# Altium PCB Ethernet_boardv3_190116.PcbDoc
Units mil, origin at the board's own origin, x right, y up, seen from the top; angles counter-clockwise.
Board outline 1870.08 x 3051.18 mil, 2 copper layers (Top Layer, Bottom Layer), stack 64.8 mil thick; 67 components, 64 nets, 454 pads, 90 vias.
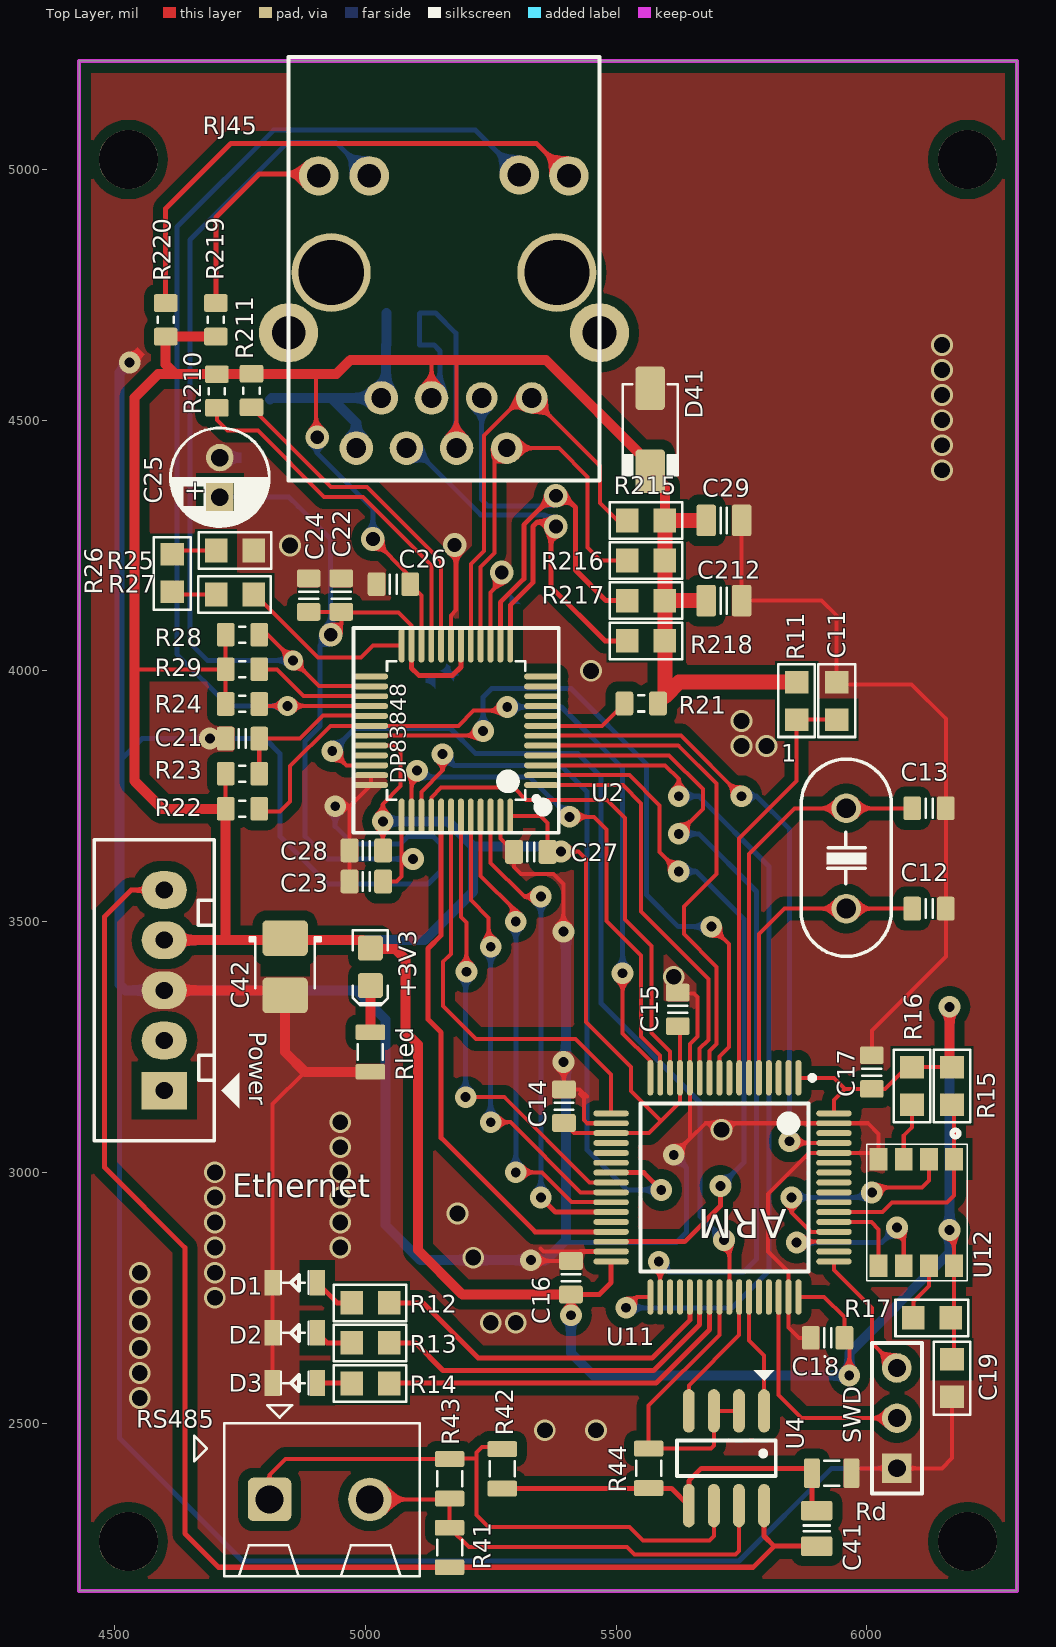
[diagram p0: Top Layer view]
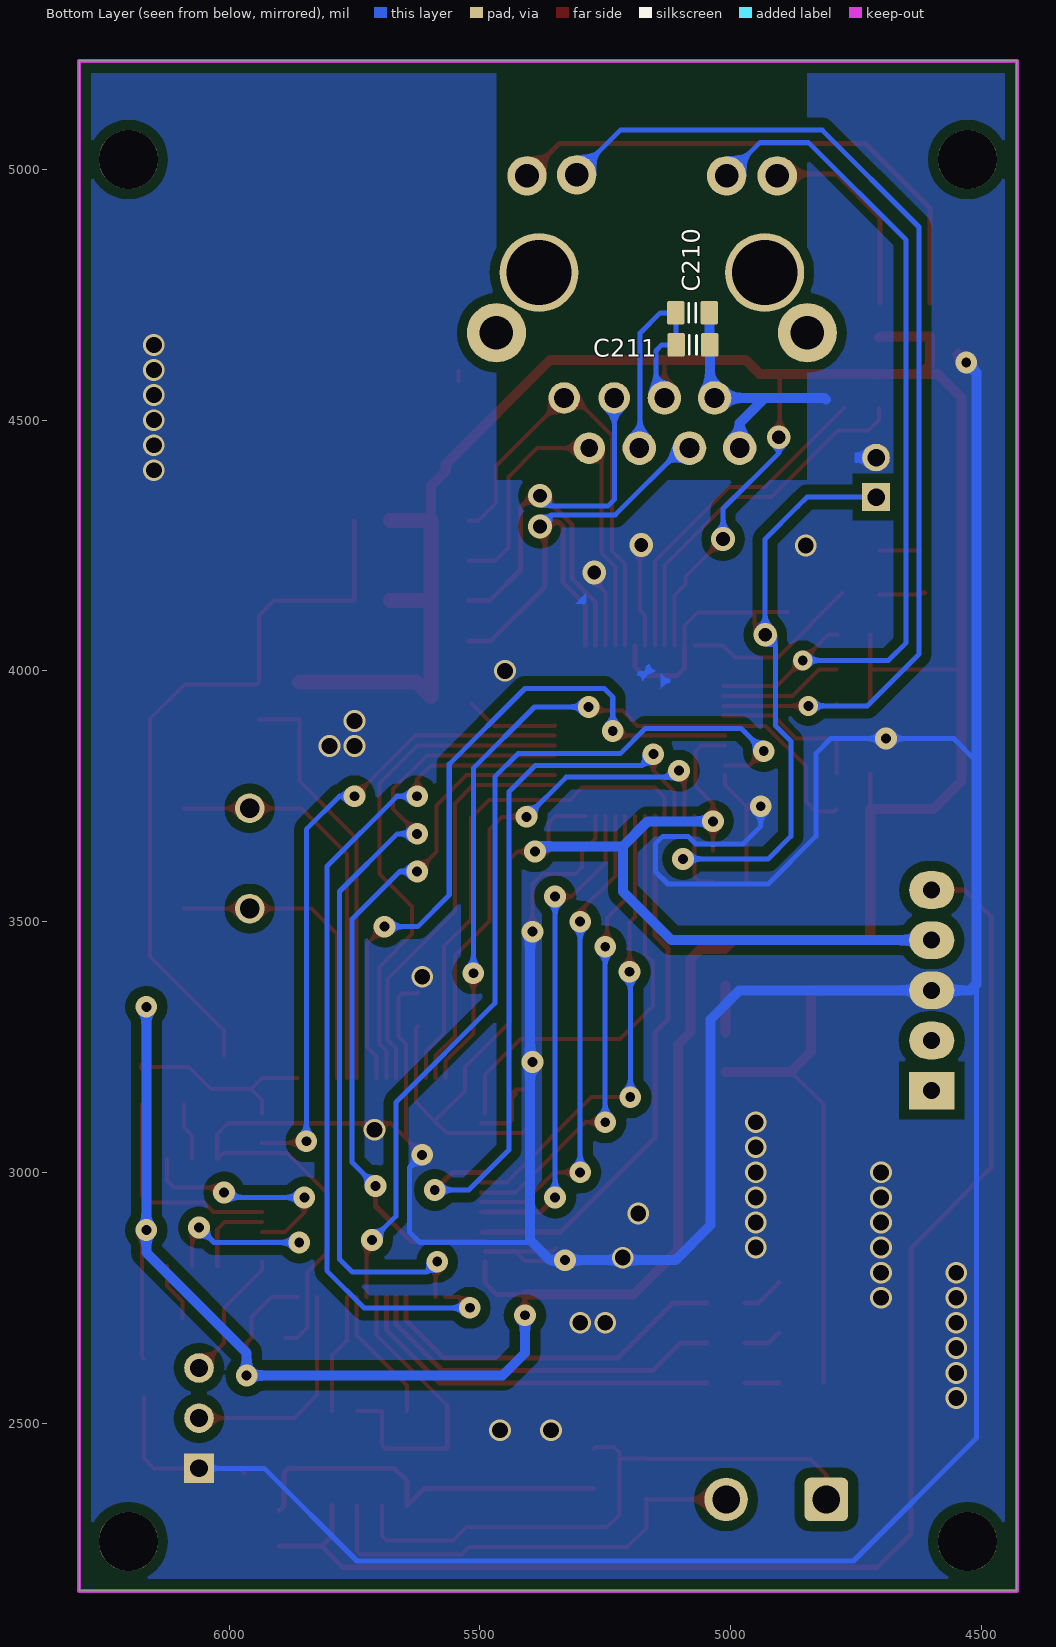
[diagram p1: Bottom Layer view, seen from below]
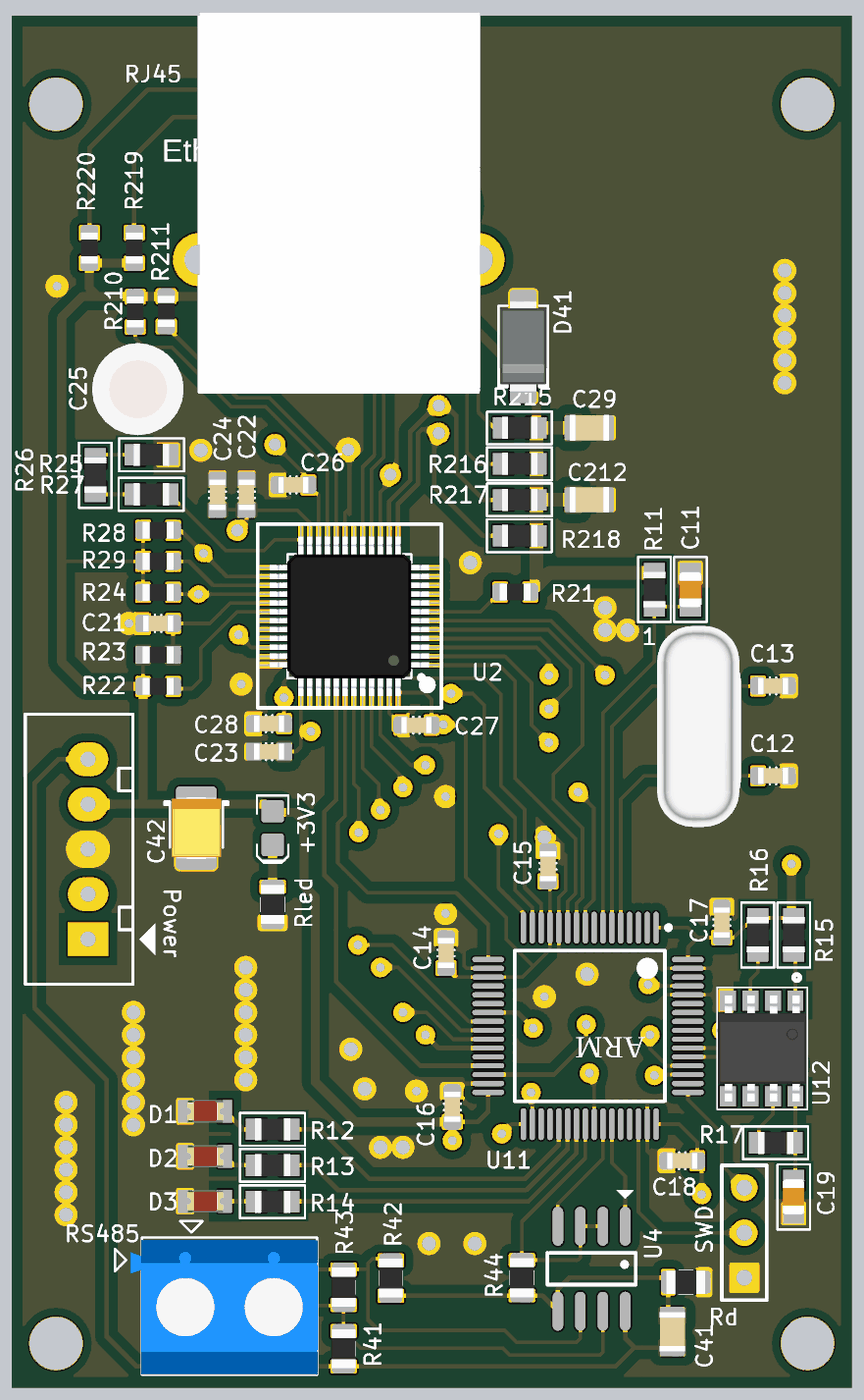
[diagram p2: 3D render of the assembled board from above, using the file's embedded part models]

## Layer stack, top to bottom
Top Solder: solder mask 0.4, Solder Resist, Dk 3.5
Top Layer: signal copper 1.4
Dielectric 1: dielectric 62, FR-4, Dk 4.8
Bottom Layer: signal copper 1.4
Bottom Solder: solder mask 0.4, Solder Resist, Dk 3.5

## Board outline
4429.13,2165.35 6299.21,2165.35 6299.21,5216.54 4429.13,5216.54

## Design rules (kind name [scope] priority, off if disabled: settings)
Clearance [All] p1: gap=20
Length [InNetClass('ETH_SIGN')] p1: maxlimit=1299.21 minlimit=1062.99
PlaneConnect [All] p1: planeconnectstyle=Direct reliefexpansion=20 reliefentries=4 reliefconductorwidth=25 reliefairgap=10
PolygonConnect PAD_GND [(InPadClass('All Pads') AND InNet('GND'))] p1: connectstyle=Direct reliefconductorwidth=25 reliefentries=4 polygonreliefangle="90 Angle" airgapwidth=10
PolygonConnect [All] p2: connectstyle=Direct reliefconductorwidth=10 reliefentries=4 polygonreliefangle="90 Angle" airgapwidth=10
RoutingVias [All] p1: holewidth=27.56 width=47.24 viastyle="Through Hole" minholewidth=19.68 minwidth=39.37 maxholewidth=196.85 maxwidth=196.85
SolderMaskExpansion [All] p1: expansion=4
Width Width_1 [All] p1: maxlimit=100 minlimit=8 preferedwidth=10
Width [InNetClass('ETH_SIGN')] p2: maxlimit=8 minlimit=8 preferedwidth=8
29 further rules are at their usual default settings.

## Classes and differential pairs
net class ETH_SIGN: MII_COL MII_CRS MII_MDC MII_MDIO MII_RX_ER MII_RXD0 MII_RXD1 MII_RXD2 MII_RXD3 MII_TX_CLK MII_TX_EN MII_TXD0 MII_TXD1 MII_TXD2 MII_TXD3
net class SPI_DATA: STM_SPI_MISO STM_SPI_MOSI STM_SPI_SCK

## Components (designator, comment, footprint, x,y, rotation, side; value= is the part's Value field where it differs from the comment)
1 "CRY_25MHZ" XT2 5959,3626 r270 top
+3V3 "Blue" LED-0805-K 5010,3410 r270 top
C11 "CAP_102_0603" CAP_0805_TOP 5940,3940 r90 top
C12 "CAP_18pF_0603" CAPC1608N_F#1 6124,3526 r0 top
C13 "CAP_18pF_0603" CAPC1608N_F#1 6124,3726 r0 top
C14 "CAP_104_0603" CAPC1608N_F#1 5396,3132 r90 top
C15 "CAP_104_0603" CAPC1608N_F#1 5623,3325 r90 top
C16 "CAP_104_0603" CAPC1608N_F#1 5410,2790 r90 top
C17 "CAP_104_0603" CAPC1608N_F#1 6010,3200 r90 top
C18 "CAP_104_0603" CAPC1608N_F#1 5921.75,2670 r180 top
C19 "CAP_104_0603" CAP_0805_TOP 6170,2590 r270 top
C21 "CAP_102_0603" CAPC1608N_F#1 4755,3865 r0 top
C22 "CAP_104_0603" CAPC1608N_F#2 4952,4151 r270 top
C23 "CAP_104_0603" CAPC1608N_F#2 5002,3580 r0 top
C24 "CAP_104_0603" CAPC1608N_F#2 4887,4151 r270 top
C25 "CAP_10uF/35V" CAP_10uF/35V 4710,4385 r90 top
C26 "CAP_104_0603" CAPC1608N_F#1 5056,4173 r0 top
C27 "CAP_104_0603" CAPC1608N_F#1 5330,3639 r180 top
C28 "CAP_104_0603" CAPC1608N_F#1 5002,3642 r0 top
C29 "CAP_104_0603" CAPC2012N_F 5715,4300 r0 top
C41 "100nF/104" CAPC2012N_F 5900,2290 r270 top
C42 "330uF/25V" CAPMP3528X210N 4840,3410 r270 top
C210 "105" CAPC1608N_F#3 5076,4714 r180 bottom
C211 "105" CAPC1608N_F#3 5075,4650 r180 bottom
C212 "105" CAPC2012N_F 5715,4140 r0 top
D1 "LED_RED_0805" "LED 0805 TOP" 4860,2780 r0 top
D2 "LED_BLUE_0805" "LED 0805 TOP" 4860,2680 r0 top
D3 "LED_GREEN_0805" "LED 0805 TOP" 4860,2580 r0 top
D41 "Diode" DO-214AC 5568,4481 r270 top
Power "JP5" CON5 4599,3163 r90 top
R11 "Res_4.7K_0805" RES_0805_TOP 5860,3940 r90 top
R12 "Res_330R_0805" RES_0805_TOP 5010,2740 r180 top
R13 "Res_330R_0805" RES_0805_TOP 5010,2660 r180 top
R14 "Res_330R_0805" RES_0805_TOP 5010,2579 r180 top
R15 "Res_4.7K_0805" RES_0805_TOP 6170,3172.6 r270 top
R16 "Res_4.7K_0805" RES_0805_TOP 6090,3172.6 r270 top
R17 "Res_4.7K_0805" RES_0805_TOP 6130,2710 r180 top
R21 "Res_2.2K_0805" RESC1608N_F#1 5550,3935 r0 top
R22 "Res_1.5K_0805" RESC1608N_F#1 4755,3725 r0 top
R23 "Res_4.7K_0805" RESC1608N_F#2 4755,3795 r180 top
R24 "Res_2.2K_0805" RESC1608N_F#1 4755,3934.07 r180 top
R25 "Res_47R_0805" RES_0805_TOP 4740,4240 r0 top
R26 "Res_120R_0805" RES_0805_TOP 4615,4195 r270 top
R27 "Res_4.7K_0805" RES_0805_TOP 4740,4152.16 r180 top
R28 "Res_0R_0603" RESC1608N_F#1 4755,4072.2 r0 top
R29 "Res_0R_0603" RESC1608N_F#1 4755,4003.13 r180 top
R41 "1k" RESC2012N_F 5168,2252 r270 top
R42 "1k" RESC2012N_F 5273,2409 r90 top
R43 "330R" RESC2012N_F 5168,2389 r270 top
R44 "330R" RESC2012N_F 5565,2410 r90 top
R210 "2k2" RESC1608N_F#1 4704,4558 r90 top
R211 "2k2" RESC1608N_F#1 4773,4559 r90 top
R215 "Res_49.9R_0805" RES_0805_TOP 5560,4300 r180 top
R216 "Res_49.9R_0805" RES_0805_TOP 5560,4220 r180 top
R217 "Res_49.9R_0805" RES_0805_TOP 5560,4140 r180 top
R218 "Res_49.9R_0805" RES_0805_TOP 5560,4060 r180 top
R219 "220R" RESC1608N_F#1 4702,4700 r90 top
R220 "220R" RESC1608N_F#1 4602,4700 r90 top
Rd "Res" RESC2012N_F 5930,2400 r0 top
RJ45 "HR911105A" HR911105A 4845,4370 r0 top
Rled "Res_0805_1k" RESC2012N_F 5010,3240 r270 top
RS485 "Stackable ScrewTerm" 2P_PCB1 4754,2499.43 r270 top
SWD "Header 3" HDR1X3 6060,2410 r90 top
U2 "DP83848CVV" LQFP48 5181,3881 r180 top
U4 "MAX485" SO-8 5720,2430 r270 top
U11 "STM32F107RC" LQFP64_N 5715.98,2970.02 r270 top
U12 "S25FL204K" SOIC_8 6100,2920 r270 top

## Footprints (in the part's own frame and the unit in brackets; to place one, negate y for a bottom-side part, rotate by r counter-clockwise, add the part's x,y. Pads: shape width x height; smd on the part's side, far side on the other; paste and mask are expansions set on the pad)
2P_PCB1 [mm]
  rrect25% 2.2x2.2 hole 1.4: 1(3.85,1.397)
  round 2.2 hole 1.4: 2(3.85,6.477)
  silkscreen extent -0.93,-2.41 7.75,9.02, body extent 0.14,-1.54 7.74,9.06, height 10.01
CAP_10uF/35V [mil]
  rect 55.12x55.12 hole 35: 1(-38.39,0)
  round 55 hole 35: 2(40.35,0)
  silkscreen extent -97,-98 99,98, body extent -101,-101 104,101, height 30
CAP_0805_TOP [mm]
  rect 1.14x1.2 smd: 1(-0.95,0) 2(0.95,0)
  silkscreen extent -1.83,-0.92 1.85,0.93, body extent -1,-0.62 1,0.63, height 0.8
CAPC1608N_F#1 [mm] "Chip Capacitor, Body 1.6x0.8mm, 0603, IPC Medium Density, for Flex circuits"
  round 0.254 on Mech14: 0(0,0)
  rrect50% 1.1x1 on Top Solder: 1(-0.85,0) 1(0.85,0)
  rrect25% 0.9x1.2 smd paste-1: 1(-0.85,0) 2(0.85,0)
  rrect50% 0.9x1 on Top Paste: 1(-0.85,0) 1(0.85,0)
  Top Layer pour cut-out: -0.4,0.6 0.4,0.6 0.4,-0.6 -0.4,-0.6
  silkscreen extent -0.18,-0.48 0.18,0.48, body extent -0.85,-0.45 0.85,0.45, height 0.89
CAPC1608N_F#2 [mm] "Chip Capacitor, Body 1.6x0.8mm, 0603, IPC Medium Density, for Flex circuits"
  round 0.254 on Mech14: 0(0,0)
  rrect25% 1.1x1 on Top Solder: 1(-0.85,0) 1(0.85,0)
  rrect25% 0.9x1.2 smd paste-1: 1(-0.85,0) 2(0.85,0)
  rrect25% 0.9x1 on Top Paste: 1(-0.85,0) 1(0.85,0)
  Top Layer pour cut-out: -0.4,0.6 0.4,0.6 0.4,-0.6 -0.4,-0.6
  silkscreen extent -0.18,-0.48 0.18,0.48, body extent -0.85,-0.45 0.85,0.45, height 0.89
CAPC1608N_F#3 [mm] "Chip Capacitor, Body 1.6x0.8mm, 0603, IPC Medium Density, for Flex circuits"
  round 0.254 on Mech14: 0(0,0)
  rrect50% 1.1x1 on Bottom Solder: 1(-0.85,0) 1(0.85,0)
  rrect25% 0.9x1.2 smd paste-1: 1(-0.85,0) 2(0.85,0)
  rrect50% 0.9x1 on Bottom Paste: 1(-0.85,0) 1(0.85,0)
  Top Layer pour cut-out: -0.4,0.6 0.4,0.6 0.4,-0.6 -0.4,-0.6
  silkscreen extent -0.18,-0.48 0.18,0.48, body extent -0.85,-0.45 0.85,0.45, height 0.89
CAPC2012N_F [mm] "Chip Capacitor, Body 2.0x1.2mm, 0805, IPC Medium Density, for Flex circuits"
  round 0.254 on Mech14: 0(0,0)
  rrect25% 1.2x1.4 on Top Solder: 1(-0.9,0) 1(0.9,0)
  rrect25% 1x1.6 smd paste-1: 1(-0.9,0) 2(0.9,0)
  rrect25% 1x1.4 on Top Paste: 1(-0.9,0) 1(0.9,0)
  Top Layer pour cut-out: -0.4,0.8 0.4,0.8 0.4,-0.8 -0.4,-0.8
  silkscreen extent -0.15,-0.65 0.15,0.65, body extent -1.1,-0.72 1.1,0.73, height 1.34
CAPMP3528X210N [mm] "Molded body capacitor, Body 3.5x2.8mm, 1210, IPC Nominal settings"
  round 0.254 on Mech14: 0(0,0)
  rrect25% 1.8x2.3 smd: 1(-1.45,0) 2(1.45,0)
  Top Layer pour cut-out: -0.508,1.27 0.508,1.27 0.508,-1.27 -0.508,-1.27
  silkscreen extent -1.5,-1.8 1.1,1.8, body extent -1.75,-1.4 1.75,1.4, height 2.1
CON5 [mil] "CON5"
  rect 75x90 hole 34: 1(0,0)
  oval 75x90 hole 34: 2(100,0) 3(200,0) 4(300,0) 5(400,0)
  silkscreen extent -100,-150 500,140
DO-214AC [mm] "JEDEC DO214 variation AC. SMA"
  round 0.508 on Mech14: 0(0,0)
  rrect25% 2.2x1.5 smd: A(-2.1,0) K(2.1,0)
  silkscreen extent -2.3,-1.4 2.3,1.4, body extent -2.6,-1.3 2.6,1.3, height 2.42
HDR1X3 [mm] "Connector; Header; 3 Position"
  rect 1.5x1.5 hole 0.9: 1(0,0)
  round 1.5 hole 0.9: 2(2.54,0) 3(5.08,0)
  silkscreen extent -1.27,-1.27 6.35,1.27, body extent -1.27,-1.27 6.35,1.27, height 7
HR911105A [mm] "HanRun HR911105A"
  round 1.6 hole 1: 1(12.369,4.425) 3(9.829,4.425)
  round 1.6 hole 0.9: 2(11.099,1.885)
  round 1.7 hole 1: 4(8.559,1.885) 5(7.289,4.425) 6(6.019,1.885) 7(4.749,4.425) 8(3.479,1.885)
  round 2 hole 1.2: 9(14.249,15.675) 10(11.735,15.723) 11(4.139,15.675) 12(1.575,15.672)
  round 3 hole 1.7: G(0.049,7.725) G(15.799,7.725)
  round 4 hole 3.3: H(2.209,10.775) H(13.639,10.775)
  silkscreen extent 0.05,0.25 15.8,21.69, body extent 0.05,0.29 15.93,21.69, height 13.51
"LED 0805 TOP" [mm]
  rect 0.8x1.3 smd: 1(1.118,0) 2(-1.143,0)
  silkscreen extent -0.71,-0.58 0.69,0.58, body extent -1.01,-0.62 1.01,0.63, height 1.1
LED-0805-K [mil]
  round 20 on Mech14: 0(0,0)
  rrect25% 50x50 smd: A(-37.5,0) K(37.5,0)
  Top Layer pour cut-out: -15,30 15,30 15,-30 -15,-30
  silkscreen extent -72,-35 77,35, body extent -39,-25 39,25, height 31
LQFP48 [mm] "Thin QFP, 48-Leads, Body 7x7mm, Pitch 0.5mm, IPC Medium Density"
  oval 1.75x0.3 smd paste-0.102 mask+0.051: 1(-4.318,2.761) 2(-4.318,2.261) 3(-4.318,1.761) 4(-4.318,1.261) 5(-4.318,0.761) 6(-4.318,0.261) 7(-4.318,-0.239) 8(-4.318,-0.739) 9(-4.318,-1.239) 10(-4.318,-1.739) 11(-4.318,-2.239) 12(-4.318,-2.739) 25(4.318,-2.739) 26(4.318,-2.239) 27(4.318,-1.739) 28(4.318,-1.239) 29(4.318,-0.739) 30(4.318,-0.239) 31(4.318,0.261) 32(4.318,0.761) 33(4.318,1.261) 34(4.318,1.761) 35(4.318,2.261) 36(4.318,2.761)
  oval 0.3x1.75 smd paste-0.102 mask+0.051: 13(-2.743,-4.318) 14(-2.243,-4.318) 15(-1.743,-4.318) 16(-1.243,-4.318) 17(-0.743,-4.318) 18(-0.243,-4.318) 19(0.257,-4.318) 20(0.757,-4.318) 21(1.257,-4.318) 22(1.757,-4.318) 23(2.257,-4.318) 24(2.757,-4.318) 37(2.757,4.318) 38(2.257,4.318) 39(1.757,4.318) 40(1.257,4.318) 41(0.757,4.318) 42(0.257,4.318) 43(-0.243,4.318) 44(-0.743,4.318) 45(-1.243,4.318) 46(-1.743,4.318) 47(-2.243,4.318) 48(-2.743,4.318)
  silkscreen extent -5.2,-5.2 5.2,5.18, body extent -4.5,-4.5 4.5,4.5, height 1.5
LQFP64_N [mm] "Thin QFP, 64-Leads, Body 10x10mm, Pitch 0.5mm, IPC Medium Density"
  oval 1.8x0.3 smd: 1(-5.55,3.75) 2(-5.55,3.25) 3(-5.55,2.75) 4(-5.55,2.25) 5(-5.55,1.75) 6(-5.55,1.25) 7(-5.55,0.75) 8(-5.55,0.25) 9(-5.55,-0.25) 10(-5.55,-0.75) 11(-5.55,-1.25) 12(-5.55,-1.75) 13(-5.55,-2.25) 14(-5.55,-2.75) 15(-5.55,-3.25) 16(-5.55,-3.75) 33(5.55,-3.75) 34(5.55,-3.25) 35(5.55,-2.75) 36(5.55,-2.25) 37(5.55,-1.75) 38(5.55,-1.25) 39(5.55,-0.75) 40(5.55,-0.25) 41(5.55,0.25) 42(5.55,0.75) 43(5.55,1.25) 44(5.55,1.75) 45(5.55,2.25) 46(5.55,2.75) 47(5.55,3.25) 48(5.55,3.75)
  oval 0.3x1.8 smd: 17(-3.75,-5.74) 18(-3.25,-5.74) 19(-2.75,-5.74) 20(-2.25,-5.74) 21(-1.75,-5.74) 22(-1.25,-5.74) 23(-0.75,-5.74) 24(-0.25,-5.74) 25(0.25,-5.74) 26(0.75,-5.74) 27(1.25,-5.74) 28(1.75,-5.74) 29(2.25,-5.74) 30(2.75,-5.74) 31(3.25,-5.74) 32(3.75,-5.74) 49(3.75,5.55) 50(3.25,5.55) 51(2.75,5.55) 52(2.25,5.55) 53(1.75,5.55) 54(1.25,5.55) 55(0.75,5.55) 56(0.25,5.55) 57(-0.25,5.55) 58(-0.75,5.55) 59(-1.25,5.55) 60(-1.75,5.55) 61(-2.25,5.55) 62(-2.75,5.55) 63(-3.25,5.55) 64(-3.75,5.55)
  silkscreen extent -5.67,-4.25 4.25,4.58, body extent -5,-5 5,5, height 1.6
RES_0805_TOP [mm]
  rect 1.14x1.2 smd: 1(-0.95,0) 2(0.95,0)
  silkscreen extent -1.83,-0.92 1.85,0.93, body extent -1,-0.62 1,0.62, height 0.5
RESC1608N_F#1 [mm] "Chip Resistor, Body 1.6x0.8mm, 0603, IPC Medium Density, for Flex circuits"
  round 0.254 on Mech14: 0(0,0)
  rrect50% 1.1x1 on Top Solder: 1(-0.85,0) 1(0.85,0)
  rrect25% 0.9x1.2 smd paste-1: 1(-0.85,0) 2(0.85,0)
  rrect50% 0.9x1 on Top Paste: 1(-0.85,0) 1(0.85,0)
  Top Layer pour cut-out: -0.4,0.6 0.4,0.6 0.4,-0.6 -0.4,-0.6
  silkscreen extent -0.15,-0.41 0.15,0.41, body extent -0.87,-0.47 0.88,0.48, height 0.54
RESC1608N_F#2 [mm] "Chip Resistor, Body 1.6x0.8mm, 0603, IPC Medium Density, for Flex circuits"
  round 0.254 on Mech14: 0(0,0)
  rrect25% 1.1x1 on Top Solder: 1(-0.85,0) 1(0.85,0)
  rrect25% 0.9x1.2 smd paste-1: 1(-0.85,0) 2(0.85,0)
  rrect25% 0.9x1 on Top Paste: 1(-0.85,0) 1(0.85,0)
  Top Layer pour cut-out: -0.4,0.6 0.4,0.6 0.4,-0.6 -0.4,-0.6
  silkscreen extent -0.15,-0.41 0.15,0.41, body extent -0.87,-0.47 0.88,0.48, height 0.54
RESC2012N_F [mm] "Chip Resistor, Body 2.0x1.2mm, 0805, IPC Medium Density"
  round 0.254 on Mech14: 0(0,0)
  rrect50% 1x1.3 on Top Solder: 1(-1,0) 1(1,0)
  rrect25% 0.8x1.5 smd paste-1: 1(-1,0) 2(1,0)
  rrect50% 0.8x1.3 on Top Paste: 1(-1,0) 1(1,0)
  Top Layer pour cut-out: -0.6,0.75 0.6,0.75 0.6,-0.75 -0.6,-0.75
  silkscreen extent -0.38,-0.64 0.38,0.64, body extent -1.1,-0.67 1.1,0.68, height 0.69
SO-8 [mm] "8-Pin Small Outline Integrated Circuit 1.27 mm Pitch, IPC Medium Density"
  oval 2.2x0.6 smd: 1(-2.4,1.905) 2(-2.4,0.635) 3(-2.4,-0.635) 4(-2.4,-1.905) 5(2.4,-1.905) 6(2.4,-0.635) 7(2.4,0.635) 8(2.4,1.905)
  silkscreen extent -4.45,-2.5 0.9,2.5, body extent -1.95,-2.45 1.95,2.45, height 1.75
SOIC_8 [mm]
  rect 1.14x0.91 smd: 1(-2.7,1.87) 2(-2.7,0.6) 3(-2.7,-0.67) 4(-2.7,-1.94) 5(2.7,-1.94) 6(2.7,-0.67) 7(2.7,0.6) 8(2.7,1.87)
  silkscreen extent -4.17,-2.55 3.45,2.55, body extent -3,-2.5 3.01,2.5, height 1.75
XT2 [mm]
  round 1.5 hole 1: 1(-2.54,0) 2(2.54,0)
  silkscreen extent -5.03,-2.29 4.96,2.29, body extent -5.93,-2.36 5.42,2.29, height 3.5

## Part data
1: library part cry, "Crystal Oscillator"
+3V3: library part LED_SMD_Blue_0805_100mcd, "LED 0805 SMD Blue 100mcd 470nm"
C11 C12 C13 C14 C15 C16 C17 C18 C19 C21 C22 C23 C24 C26 C27 C28 C29 C210 C211 C212: library part "Cap 1206 BUT", "Capacitor"
C25: library part "CAP P"
C41: library part "CAP NP"
C42: library part CP4, "Cap 1000uF/16V - 220uF/50V"
D1 D2 D3: library part "LED 0805 TOP", "Typical INFRARED GaAs LED"
Power: library part Con5, "Connector 5"
R11 R12 R13 R14 R15 R16 R17 R21 R22 R23 R24 R25 R26 R27 R28 R29 R215 R216 R217 R218 R219 R220: library part Res, "Resistor"
R41 R42 R43 R44: library part Res, "Tro dan"
R210 R211 Rled: library part Res
RJ45: library part RJ45-LED
RS485: library part 2P_ScrewTerm_90S_3.81MM, "Terminal Block Screw Type THT 2-Position 3.81mm pitch"
SWD: "Header, 3-Pin"
U4: "RS232 - RS485 (Same sn75176)"
U11: library part STM32F103RBT6, "STM32 ARM-based 32-bit MCU with 128 Kbytes Flash, 64-pin LQFP, Industrial Temperature"

## Free pads (board coordinates)
  round 118.11 hole 118.11: 1(4527.56,2263.78) 1(4527.56,5019.69) 1(6200.79,2263.78) 1(6200.79,5019.69)

## Via types
v1: diameter 43.31, hole 19.68, Top Layer to Bottom Layer, 44 vias
v2: diameter 43.31, hole 31.5, Top Layer to Bottom Layer, 37 vias
v3: diameter 47.24, hole 27.56, Top Layer to Bottom Layer, 7 vias
v4: diameter 39.37, hole 19.68, Top Layer to Bottom Layer, 2 vias

## Nets (pads, with @x,y where several pads share a name; then routed paths per layer and width w, separated by ;. In a path a pad name is that pad's centre, name@x,y a point inside that pad or via, vN(x,y) a via of type N, cw(c..) or ccw(c..) an arc to the next point about the centre after c; other vN are vias at no path point)
25M_OUT: U2.25
+3V3: +3V3.A C14.1@5396,3098.54 C15.1@5623,3291.54 C16.1@5410,2756.54 C17.1@6010,3166.54 C18.1@5955.21,2670 C19.1 C26.2 C27.1@5363.46,3639 C28.2 C29.1@5679.57,4300 C42.1 C210.1@5109.46,4714 C211.1@5108.46,4650 C212.1@5679.57,4140 D41.K Power.4 R11.2 R15.1 R16.1 R17.1 R21.2 R22.1@4721.54,3725 R23.2 R24.2 R28.1@4721.54,4072.2 R29.2 R210.2 R211.2 R215.1 R216.1 R217.1 R218.1 R219.1@4702,4666.54 R220.1@4602,4666.54 RJ45.4 RJ45.5 U2.22 U2.32 U2.48 U11.1 U11.13 U11.19 U11.32 U11.48 U11.64 U12.8 | length 12016.8
  Top Layer w8: 4540,4000 4543.13,4003.13 R29.2 ; R22.1@4721.54,3725 R23.2 ; R24.2 R29.2 ; R28.1@4721.54,4072.2 R29.2 ; 4902,4592 4902,4468 v3(4904,4466) ; +3V3.A +3V3.A@5012.5,3445 ; U2.32 5058,3851.04 5070,3839.04 5070,3770 5035,3735 v1(5035,3700) 5035,3642.46 C28.2 ; v3(5015,4263) 5089.46,4188.54 C26.2 5111.83,4150.63 U2.22 ; 5125,4620 5131.96,4613.04 RJ45.5 ; 5179,4620 5181.46,4617.54 5181.46,4444.69 RJ45.4 ; U2.48 5349,3711 5363.46,3696.54 5363.46,3639 5419,3639 5420,3640 ; v1(5390,3640) 5420,3640 ; C14.1@5396,3098.54 5416.24,3078.29 U11.19 5565.69,3078.29 5590,3102.6 ; v1(5410,2715) C16.1@5410,2756.54 ; C15.1@5623,3291.54 5627.4,3287.13 U11.13 5627.4,3140 5590,3102.6 ; U11.48 5915,2751.52 5955.21,2711.31 5955.21,2670 5965,2660.21 v1(5965,2595) ; U11.1 5934.54,3188.53 5956.54,3166.54 ; U11.64 5934.49,3144.49 5956.54,3166.54 ; v1(6165,2885) 6175,2885 6173.62,2883.62 U12.8 6173.62,2631.02 C19.1 ; R15.1 R16.1 6080,3210 6036.54,3166.54 6010,3166.54 5956.54,3166.54 ; 5420,3640 5425,3640 5440,3625 5440,3300 5530,3210 5530,3162.6 5590,3102.6
  Top Layer w10: C16.1@5410,2756.54 5466.54,2756.54 5490,2780 U11.32
  Top Layer w20: Power.4 4720,3463 ; R210.2 R210.2@4704,4592 ; R219.1@4704,4664.54 4702,4666.54 4602,4666.54 4602,4611 4621,4592 ; +3V3.A 4994.5,3463 4720,3463 ; +3V3.A@5012.5,3445 5060,3445 5080,3425 5080,3280 5105,3255 5105,2845 5193.46,2756.54 C16.1@5410,2756.54 ; R215.1 5597.4,4368.92 D41.K 5568,4412 5360,4620 5179,4620 5125,4620 4970,4620 4942,4592 4902,4592 R210.2@4704,4592 ; v1(6165,3330) 6165,3215 R15.1 ; 4621,4592 4587,4592 4540,4545 4540,4000 4540,3780 4595,3725 4721.54,3725 4721.54,3464.54 4720,3463 ; 4621,4592 R210.2@4704,4592
  Top Layer w30: C212.1@5679.57,4140 R217.1 ; C29.1@5679.57,4300 R215.1 R216.1 R217.1 ; R11.2 5625.87,3977.4 5597.4,3948.94 R218.1 R217.1
  Bottom Layer w10: v3(4904,4466) 4904,4434 5015,4323 v3(5015,4263) ; RJ45.5 5149,4561.24 5149,4638 5137,4650 5108.46,4650 5108.46,4713 5109.46,4714 5140,4714 5180.54,4673.46 5180.54,4445.62 RJ45.4
  Bottom Layer w20: Power.4 5118,3463 5215,3560 5215,3650 ; v1(5035,3700) 5165,3700 5215,3650 ; v1(5390,3640) 5380,3650 5215,3650 ; v1(5410,2715) 5410,2640 5455,2595 v1(5965,2595) 5965,2640 6165,2840 v1(6165,2885) v1(6165,3330)
+5V: C41.2 Power.5 R41.2 U4.8 | length 2831.9
  Top Layer w10: Power.5 4533,3563 4480,3510 4480,3010 4640,2850 4640,2280 4707.37,2212.63 R41.2 5773.5,2212.63 5815.43,2254.57 ; U4.8 5795,2275 5815.43,2254.57 ; C41.2 5815.43,2254.57
DGND: C41.1@5900,2325.43 R42.1@5273,2369.63 R44.1@5565,2370.63 Rd.1@5890.63,2400 U4.5 | length 774.2
  Top Layer w10: R42.1@5273,2369.63 5610.88,2369.63 U4.5 5645,2385 5670,2410 5880.63,2410 5890.63,2400 5890.63,2334.8 C41.1@5900,2325.43
ETH_MCO: U2.34 U11.41 | length 1826.6
  Top Layer w8: v1(4934,3840) 4962.33,3811.67 U2.34 ; v1(5715,2865) 5725.83,2854.17 U11.41
  Bottom Layer w10: v1(4934,3840) 4979,3885 5170,3885 5220,3835 5424,3835 5470,3789 5470,3337 5667.5,3139.5 5667.5,2912.5 v1(5715,2865)
GND: C11.2 C12.2 C13.2 C14.2 C15.2 C16.2 C17.2 C18.2 C19.2 C21.1@4721.54,3865 C22.1@4952,4184.46 C23.1@4968.54,3580 C24.1@4887,4184.46 C25.2 C26.1@5022.54,4173 C27.2 C28.1@4968.54,3642 C29.2 C42.2 C210.2 C211.2 C212.2 D1.2 D2.2 D3.2 D41.A Power.3 R25.2 Rd.2 RJ45.7 RJ45.8 Rled.2 SWD.1 U2.15 U2.19 U2.35 U2.36 U2.47 U11.12 U11.18 U11.31 U11.47 U11.60 U11.63 U12.4 | length 14239.4
  Top Layer w8: D3.2 D2.2 D1.2 4815,3136.26 4879.37,3200.63 ; v1(4940,3730) 4940.17,3729.83 4968.54,3729.83 ; C23.1@4968.54,3580 4968.54,3642 4968.54,3729.83 ; U2.35 U2.36 4968.54,3729.83 ; U2.19 5170.89,4110.89 5181,4121 5181,4248 v3(5178,4251) v3@5170.89,4243.89 ; U2.15 5249.63,4156.63 5272,4179 v3(5272,4196) ; U2.47 5269.31,3666.22 C27.2 5296.54,3608.46 5310,3595 5375,3595 5395,3575 v1(5395,3480) ; v1(5330,2825) 5331.54,2823.46 C16.2 5428.61,2842.07 5354.93,2842.07 5349,2848 ; v1(5395,3220) 5396,3219 C14.2 5427.54,3165.46 5442,3151 ; 5428,3156 5436,3148 5436,3104 5442.02,3097.98 5458.02,3097.98 U11.18 U11.18@5497.48,3097.98 ; D41.A@5543,4577.68 D41.A@5543,4598.12 ; v1(5615,3035) 5647.09,3067.09 ; C15.2 5624.46,3357 5655,3357 5662,3350 5662,3271 5647.09,3256.09 U11.12 5647.09,3067.09 ; C29.2 C212.2 5910,4140 5940,4110 C11.2 5944.4,3973 6089,3973 6157.46,3904.54 C13.2 C12.2 6157.46,3430.46 6010,3283 C17.2 ; C18.2 5865,2670 5843.94,2691.06 U11.47 5843.94,2801.06 5803,2842 5803,2957 5884.92,3038.92 U11.60 6011,3038.92 U12.4 6023.62,3076.38 6002.02,3097.98 U11.63 5677.98,3097.98 5647.09,3067.09 ; Rd.2 5979.37,2410 SWD.1 6150,2410 6170,2430 C19.2
  Top Layer w10: 5428.61,2842.07 U11.31
  Top Layer w20: Power.3 4829.91,3363 C42.2 4840,3240 4879.37,3200.63 Rled.2
  Bottom Layer w10: 4510,3375 4510,2470 4755,2225 5745,2225 5930,2410 SWD.1 ; 4510,3820 4555,3865 v1(4690,3865) 4800,3865 4830,3835 4830,3670 4925,3575 5125,3575 5150,3600 5150,3655 5135,3670 5085,3670 5070,3655 4975,3655 4940,3690 v1(4940,3730) ; 5395,2860 v1(5395,3220) ; 5405,2860 5620,2860 5640,2880 5640,3010 v1(5615,3035)
  Bottom Layer w20: v1(4530,4615) 4510,4595 4510,3820 4510,3375 4522,3363 Power.3 4982,3363 5040,3305 5040,2895 5110,2825 v1(5330,2825) 5360,2825 5395,2860 ; 4810,4541 4813.2,4544.2 4931.96,4544.2 ; RJ45.8 4981.96,4494.2 4931.96,4544.2 ; C210.2 5042.54,4651 C211.2 5041.54,4553.77 RJ45.7 4931.96,4544.2 ; v1(5395,3480) 5400,3475 5400,2865
  other v2: 5358,2486 5460,2486 4550,2550 4550,2600 4550,2650 4550,2700 5250,2700 5300,2700 4550,2750 4700,2750 4550,2800 4700,2800 5215,2830 4700,2850 4950,2850 4700,2900 4950,2900 5184,2918 4700,2950 4950,2950 4700,3000 4950,3000 4950,3050 5710,3085 4950,3100 5615,3390 5750,3850 5800,3850 5750,3900 5450,4000 4850,4250 6150,4400 6150,4450 6150,4500 6150,4550 6150,4600 6150,4650
INT: R21.1@5516.54,3935 U2.7 | length 184.7
  Top Layer w8: U2.7@5350.28,3890.91 U2.7@5351,3890.91 ; U2.7 5471.94,3890.41 R21.1@5516.54,3935
LED_ACT: R28.2 RJ45.11 U2.26 | length 1760.7
  Top Layer w8: R28.2@4786.8,4072.2 4804.8,4072.2 4907.35,3969.65 U2.26@5015.63,3969.65
  Bottom Layer w10: v4(4856.08,4020.92) 4685.08,4020.92 4650,4056 4650,4859 4844.23,5053.23 4941.83,5053.23 RJ45.11
LED_LINK: R24.1@4788.46,3934.07 RJ45.10 U2.28 | length 2145.2
  Top Layer w8: R24.1@4788.46,3934.07 4792.25,3930.28 v4@4845,3930.28 ; v4(4845,3930) v4@4845,3930.28 ; U2.28@5015.63,3930.28 v4@4845,3930.28
  Bottom Layer w10: v4(4845,3930) 4727.48,3930 4624.21,4033.27 4624.21,4885.21 4817.23,5078.23 5219.8,5078.23 RJ45.10@5308.27,4989.76
LED_SPEED: R29.1@4788.46,4003.13 U2.27 | length 249.2
  Top Layer w8: R29.1@4788.46,4003.13 4823.87,4003.13 4877.04,3949.96 U2.27@5015.63,3949.96
MII_COL: U2.42 U11.17 | length 854.7
  Top Layer w8: U2.42 5170.89,3435.89 5155,3420 5155,3332 5221,3266 5419,3266 5490,3195 U11.17
MII_CRS: U2.40 U11.14 | length 1011.6
  Top Layer w8: U2.40 5131.52,3747.52 5151,3767 5296,3767 5320,3743 5482,3743 5518,3707 5518,3504 5571,3451 5571,3278 5607.72,3241.28 U11.14
MII_MDC: U2.31 U11.9 | length 1431.3
  Top Layer w8: U2.31 5225.72,3870.72 v1(5235,3880) ; v1(5690,3490) 5725,3455 5725,3250 5706.14,3231.14 U11.9
  Bottom Layer w10: v1(5235,3880) 5235,3948 5252,3965 5410,3965 5561,3814 5561,3553 5624,3490 v1(5690,3490)
MII_MDIO: R22.2 U2.30 U11.16 | length 1544.7
  Top Layer w8: R22.2 4793.46,3720 4830,3720 4850,3740 4850,3810 4930.41,3890.41 U2.30 5185.41,3890.41 5215.65,3920.65 5275.65,3920.65 v1(5283,3928) ; v1(5513,3397) 5513,3277 5568.35,3221.65 U11.16
  Bottom Layer w10: v1(5283,3928) 5391,3928 5513,3806 v1(5513,3397)
MII_RX_CLK: U2.38 U11.15 | length 1060.8
  Top Layer w8: U2.38 5092.15,3790.15 v1(5103,3801) ; v1(5407,3709) 5456,3709 5481,3684 5481,3501 5550,3432 5550,3271 5588.03,3232.97 U11.15
  Bottom Layer w10: v1(5103,3801) 5116,3788 5328,3788 v1(5407,3709)
MII_RX_DV: U2.39 U11.23 | length 1469
  Top Layer w8: U2.39 5111.83,3758.83 5154,3801 v1(5154,3834)
  Top Layer w10: U11.23 5555.45,2999.55 v1(5590,2965)
  Bottom Layer w10: v1(5154,3834) 5177,3811 5390,3811 5442,3759 5442,3045 5522,2965 v1(5590,2965)
MII_RX_ER: U2.41 U11.29 | length 1091
  Top Layer w8: U2.41@5149.35,3709.14 U2.41 ; U11.29@5490,2880 5496.04,2880 U11.29@5497.48,2881.44
  Top Layer w10: U2.41 5151.2,3472.71 5125,3446.51 5125,3305.2 5151.2,3279 5151.2,3068.8 5338.56,2881.44 U11.29
MII_RXD0: U2.43 U11.24 | length 934.2
  Top Layer w8: U2.43 5190.57,3509.43 5201.57,3498.43 v1(5201.57,3400) ; v1(5200,3150) 5277,3150 5447.13,2979.87 U11.24 U11.24@5497.48,2979.87
  Bottom Layer w10: v1(5200,3150) 5200,3398.43 v1(5201.57,3400)
MII_RXD1: U2.44 U11.25 | length 933.7
  Top Layer w8: U2.44 5210.26,3542.74 5246,3507 5246,3454 v1(5250,3450) ; v1(5250,3100) 5289,3100 5428.82,2960.18 U11.25 U11.25@5497.48,2960.18
  Bottom Layer w10: v1(5250,3100) 5250,3448 5249,3449 v1(5250,3450)
MII_RXD2: U2.45 U11.26 | length 966.4
  Top Layer w8: U2.45 5229.94,3591.06 5300,3521 v1(5300,3500) ; v1(5300,3000) 5352,3000 5411.5,2940.5 U11.26 U11.26@5497.48,2940.5
  Bottom Layer w10: v1(5300,3000) 5300,3497 5303,3500 v1(5300,3500)
MII_RXD3: U2.46 U11.27 | length 981.5
  Top Layer w8: U2.46 5249.63,3617.37 5317,3550 v1(5350,3550) ; U11.27 U11.27@5497.48,2920.81
  Top Layer w10: v1(5350,2950) 5379.19,2920.81 U11.27
  Bottom Layer w10: v1(5350,2950) v1(5350,3550)
MII_TX_CLK: U2.1 U11.11 | length 824.1
  Top Layer w8: U2.1 5513.7,3772.3 5550,3736 5550,3520 5684,3386 5684,3264 5666.77,3246.77 U11.11
MII_TX_EN: U2.2 U11.30 | length 1416.6
  Top Layer w8: U2.2 5526.52,3791.98 5586.5,3732 5586.5,3638.5 v1(5625,3600)
  Top Layer w10: U11.30 5636.76,2861.76 5708,2933 v1(5708,2973)
  Bottom Layer w10: v1(5625,3600) 5660,3600 5755,3505 5755,3020 v1(5708,2973)
MII_TXD0: U2.3 U11.33 | length 1736.4
  Top Layer w8: U2.3 5597.33,3811.67 5625,3784 v1(5625,3750) ; v1(5520,2730) 5541.52,2751.52 U11.33
  Bottom Layer w10: v1(5520,2730) 5731,2730 5805,2804 5805,3610 5665,3750 v1(5625,3750)
MII_TXD1: U2.4 U11.34 | length 1680.6
  Top Layer w8: U2.4 5605.65,3831.35 5673,3764 5673,3725 5625,3677 v1(5625,3675) ; v1(5585,2822) 5588.03,2818.97 U11.34
  Bottom Layer w10: v1(5585,2822) 5606,2801 5754,2801 5780,2827 5780,3560 5665,3675 v1(5625,3675)
MII_TXD2: U2.5 U11.10 | length 1026.4
  Top Layer w8: U2.5 5623.96,3851.04 5700,3775 5700,3595 5635,3530 5635,3475 5700,3410 5700,3256 5686.46,3242.46 U11.10
MII_TXD3: U2.6 U11.61 | length 1284.2
  Top Layer w8: U2.6 5629.28,3870.72 v1(5750,3750) ; v1(5846,3062) 5849.39,3058.61 U11.61
  Bottom Layer w10: v1(5750,3750) 5780,3750 5846,3684 v1(5846,3062)
Net+3V3_K: +3V3.K Rled.1@5010,3279.37 | length 93.1
  Top Layer w20: Rled.1@5010,3279.37 +3V3.K
NetD1_1: D1.1 R12.2 | length 85.2
  Top Layer w10: D1.1 4944,2740 R12.2
NetD2_1: D2.1 R13.2 | length 76.9
  Top Layer w10: D2.1 4924,2660 R13.2
NetD3_1: D3.1 R14.2 | length 68.6
  Top Layer w10: D3.1 R14.2@4972.6,2580
NetR16_2: R16.2 U12.3 | length 115.7
  Top Layer w8: U12.3 6073.62,3073.62 6090,3090 R16.2
NetR17_2: R17.2 U12.7 | length 116.6
  Top Layer w8: R17.2 6092.6,2742.6 6123.62,2773.62 U12.7
NetR25_1: R25.1 R26.1 | length 80
  Top Layer w8: R26.1@4622.6,4240 R25.1
NetR26_2: R26.2 R27.2 | length 89.9
  Top Layer w8: R26.2 4620.44,4152.16 R27.2
NetR27_1: R27.1 U2.24 | length 358
  Top Layer w8: R27.1@4777.4,4155 4905.4,4027 4991,4027 5015,4051 U2.24
NetR210_1: R210.1@4704,4524.54 U2.21 | length 731.5
  Top Layer w8: R210.1@4704,4524.54 4704,4500 4725,4479 4786,4479 4918,4347 4995,4347 5131.52,4210.48 U2.21
NetR211_1: R211.1@4773,4525.54 U2.20 | length 673
  Top Layer w8: R211.1@4773,4525.54 4931.85,4366.69 5003.15,4366.69 5151.2,4218.63 U2.20
NetR219_2: R219.2 RJ45.12 | length 413.2
  Top Layer w10: R219.2 4702,4904 4789,4991 4903,4991 RJ45.12
NetR220_2: R220.2 RJ45.9 | length 1073.2
  Top Layer w10: R220.2 4602,4922 4732,5052 5341.09,5052 RJ45.9
NRST: C11.1 R11.1 U11.7 | length 841.5
  Top Layer w8: U11.7 5745.51,3665.51 5860,3780 R11.1 C11.1
OSC_IN: 1.2 C12.1@6090.54,3526 U11.5 | length 613.2
  Top Layer w8: U11.5 5784.88,3474.88 5836,3526 1.2 C12.1@6090.54,3526
OSC_OUT: 1.1 C13.1@6090.54,3726 U11.6 | length 809.6
  Top Layer w8: U11.6 5765.2,3635.2 5856,3726 1.1 C13.1@6090.54,3726
PC9: R44.2 U4.2 U4.3 U11.40 | length 612.4
  Top Layer w8: U11.40 5706.14,2676.14 5565,2535 R44.2 5689.37,2449.37 5695,2455 U4.3 U4.2
PFB: C22.2 C23.2 C24.2 C25.1 U2.18 U2.23 U2.37 | length 1799.3
  Top Layer w8: C24.2@4888,4116.54 C24.2 C22.2 ; v3(4931,4072) 4952,4093 C22.2 ; C23.2 5062,3580 5072.46,3590.46 5072.46,3625 ; U2.37 5072.46,3625 ; U2.23 5092.15,4090.09 5065.7,4116.54 4953,4116.54 C22.2 ; v1(5095,3625) 5072.46,3625
  Top Layer w10: U2.23 5092.15,4005.51 5106.66,3991 5174,3991 5190.57,4007.57 U2.18
  Bottom Layer w10: C25.1 4847.39,4346.61 4866,4328 4931,4263 v3(4931,4072) 4910,4051 4910,3890 4880,3860 4880,3670 4925,3625 v1(5095,3625)
PHY_RESET: C21.2 R23.1@4788.46,3795 U2.29 | length 316
  Top Layer w8: R23.1@4788.46,3795 C21.2 4870,3865 4915.59,3910.59 U2.29@5015.63,3910.59
RD+: R217.2 RJ45.3 U2.14 | length 1014.4
  Top Layer w10: U2.14 5269.31,4136.77 5316,4183.46 5316,4291.21 5374.03,4349.24 v3(5380,4349.24) 5395.76,4349.24 5419,4326 5419,4201 5480,4140 R217.2
  Bottom Layer w10: RJ45.3 5231.96,4341.25 5244.09,4329.12 5359.88,4329.12 v3(5380,4349.24)
RD-: R218.2 RJ45.6 U2.13 | length 1002.8
  Top Layer w10: U2.13 5289,4131 5334,4176 5334,4288 5343,4297 5383,4297 5380,4294 v3(5380,4288) 5370,4278 5370,4168 5478,4060 R218.2
  Bottom Layer w10: RJ45.6 5096.8,4444.2 5229.88,4311.12 5356.88,4311.12 v3(5380,4288)
RS485A: R42.2 R43.1@5168,2428.37 RS485.1 U4.6 | length 1214.5
  Top Layer w8: RS485.1 4809,2396.37 4841,2428.37 5168,2428.37 5168.63,2429 5222,2429 ; R42.2 5269.37,2452 5233,2452 5222,2441 5222,2429 ; U4.6 5695,2275 5686,2266 5554,2266 5527,2293 5246,2293 5222,2317 5222,2429
RS485B: R41.1@5168,2291.37 R43.2 RS485.2 U4.7 | length 910.5
  Top Layer w8: RS485.2 5166.23,2347.86 R43.2 5168,2291.37 5206.37,2253 5522,2253 5537,2238 5738,2238 5745,2245 U4.7
STM_BUTTON: U11.36
STM_LED1: R12.1 U11.37 | length 722.7
  Top Layer w10: R12.1 5115,2740 5225,2630 5571.92,2630 5647.09,2705.17 U11.37
STM_LED2: R13.1 U11.38 | length 734.9
  Top Layer w10: R13.1 5100,2660 5155,2605 5575,2605 5666.77,2696.77 U11.38
STM_LED3: R14.1 U11.39 | length 748.2
  Top Layer w10: R14.1@5047.4,2580 5580,2580 5686.46,2686.46 U11.39
STM_SPI_CS: R15.2 U11.54 U12.1 | length 434.3
  Top Layer w8: U11.54 6030.81,2920.81 6050,2940 6160,2940 6173.62,2953.62 U12.1 R15.2@6173.62,3135.2
STM_SPI_MISO: U11.52 U12.2 | length 460.7
  Top Layer w8: v1(5850,2950) 5850,2920 5888.56,2881.44 U11.52 ; v1(6010,2960) 6020,2970 6110,2970 6123.62,2983.62 U12.2
  Bottom Layer w10: v1(5850,2950) 6000,2950 v1(6010,2960)
STM_SPI_MOSI: U11.53 U12.5 | length 167.9
  Top Layer w8: U11.53 6008.87,2901.13 6023.62,2886.38 U12.5
STM_SPI_SCK: U11.51 U12.6 | length 369.6
  Top Layer w8: v1(5860,2860) 5861.76,2861.76 U11.51 ; v1(6060,2890) 6073.62,2876.38 U12.6
  Bottom Layer w10: v1(5860,2860) 6030,2860 v1(6060,2890)
STM_USART1_RX: U4.1 U11.43 | length 239.4
  Top Layer w8: U11.43 5765.2,2664.8 5795,2635 U4.1
STM_USART1_TX: U4.4 U11.42 | length 268.7
  Top Layer w8: U4.4 5645,2575 5745.51,2675.51 U11.42
SWCLK: SWD.3 U11.49 | length 264.4
  Top Layer w8: U11.49 5934.49,2805.51 6010,2730 6010,2660 SWD.3
SWDIO: SWD.2 U11.46 | length 450.5
  Top Layer w8: U11.46 5824.25,2555.75 5870,2510 SWD.2
TD+: R215.2 RJ45.1 U2.17 | length 890.5
  Top Layer w8: U2.17 5210.26,4212.92 5236.46,4239.13 5236.46,4469.65 5311.01,4544.2 RJ45.1 5468,4408.16 5468,4335 5503,4300 R215.2
TD-: R216.2 RJ45.2 U2.16 | length 830.8
  Top Layer w8: U2.16 5229.94,4207.15 5257.46,4234.67 5257.46,4419.7 RJ45.2 5385.8,4444.2 5443,4387 5443,4246 5469,4220 R216.2
pads on no net: +3V3.0 C12.0 C12.1@6090.54,3526 C12.1@6090.54,3526.01 C12.1@6157.46,3525.99 C12.1@6157.46,3526 C13.0 C13.1@6090.54,3726 C13.1@6090.54,3726.01 C13.1@6157.46,3725.99 C13.1@6157.46,3726 C14.0 C14.1@5395.99,3098.54 C14.1@5396,3098.54 C14.1@5396,3165.46 C14.1@5396.01,3165.46 C15.0 C15.1@5622.99,3291.54 C15.1@5623,3291.54 C15.1@5623,3358.46 C15.1@5623.01,3358.46 C16.0 C16.1@5409.99,2756.54 C16.1@5410,2756.54 C16.1@5410,2823.46 C16.1@5410.01,2823.46 C17.0 C17.1@6009.99,3166.54 C17.1@6010,3166.54 C17.1@6010,3233.46 C17.1@6010.01,3233.46 C18.0 C18.1@5888.28,2670 C18.1@5888.29,2670.01 C18.1@5955.21,2669.99 C18.1@5955.21,2670 C21.0 C21.1@4721.54,3865 C21.1@4721.54,3865.01 C21.1@4788.46,3864.99 C21.1@4788.46,3865 C22.0 C22.1@4951.99,4117.54 C22.1@4952,4117.54 C22.1@4952,4184.46 C22.1@4952.01,4184.46 C23.0 C23.1@4968.54,3580 C23.1@4968.54,3580.01 C23.1@5035.46,3579.99 C23.1@5035.46,3580 C24.0 C24.1@4886.99,4117.54 C24.1@4887,4117.54 C24.1@4887,4184.46 C24.1@4887.01,4184.46 C26.0 C26.1@5022.54,4173 C26.1@5022.54,4173.01 C26.1@5089.46,4172.99 C26.1@5089.46,4173 C27.0 C27.1@5296.54,3639 C27.1@5296.54,3639.01 C27.1@5363.46,3638.99 C27.1@5363.46,3639 C28.0 C28.1@4968.54,3642 C28.1@4968.54,3642.01 C28.1@5035.46,3641.99 C28.1@5035.46,3642 C29.0 C29.1@5679.56,4299.99 C29.1@5679.57,4300 C29.1@5750.43,4299.99 C29.1@5750.43,4300 C41.0 C41.1@5899.99,2254.57 C41.1@5899.99,2325.44 C41.1@5900,2254.57 C41.1@5900,2325.43 C42.0 C210.0 C210.1@5042.54,4713.99 C210.1@5042.54,4714 C210.1@5109.46,4714 C210.1@5109.46,4714.01 C211.0 C211.1@5041.54,4649.99 C211.1@5041.54,4650 C211.1@5108.46,4650 C211.1@5108.46,4650.01 C212.0 C212.1@5679.56,4139.99 C212.1@5679.57,4140 C212.1@5750.43,4139.99 C212.1@5750.43,4140 D41.0 Power.1 Power.2 R21.0 R21.1@5516.54,3935 R21.1@5516.54,3935.01 R21.1@5583.46,3935 R21.1@5583.47,3935.01 R22.0 R22.1@4721.54,3725 R22.1@4721.54,3725.01 R22.1@4788.46,3725 R22.1@4788.47,3725.01 R23.0 R23.1@4721.53,3794.99 R23.1@4721.54,3795 R23.1@4788.46,3794.99 R23.1@4788.46,3795 R24.0 R24.1@4721.53,3934.06 R24.1@4721.54,3934.07 R24.1@4788.46,3934.06 R24.1@4788.46,3934.07 R28.0 R28.1@4721.54,4072.2 R28.1@4788.46,4072.2 R28.1@4788.47,4072.2 R29.0 R29.1@4721.53,4003.12 R29.1@4721.54,4003.13 R29.1@4788.46,4003.12 R29.1@4788.46,4003.13 R41.0 R41.1@5167.99,2212.63 R41.1@5167.99,2291.37 R41.1@5168,2212.63 R41.1@5168,2291.37 R42.0 R42.1@5273,2369.63 R42.1@5273,2448.37 R42.1@5273.01,2369.63 R42.1@5273.01,2448.37 R43.0 R43.1@5167.99,2349.63 R43.1@5167.99,2428.37 R43.1@5168,2349.63 R43.1@5168,2428.37 R44.0 R44.1@5565,2370.63 R44.1@5565,2449.37 R44.1@5565.01,2370.63 R44.1@5565.01,2449.37 R210.0 R210.1@4703.99,4524.54 R210.1@4703.99,4591.47 R210.1@4704,4524.54 R210.1@4704,4591.46 R211.0 R211.1@4772.99,4525.54 R211.1@4772.99,4592.47 R211.1@4773,4525.54 R211.1@4773,4592.46 R219.0 R219.1@4701.99,4666.54 R219.1@4701.99,4733.47 R219.1@4702,4666.54 R219.1@4702,4733.46 R220.0 R220.1@4601.99,4666.54 R220.1@4601.99,4733.47 R220.1@4602,4666.54 R220.1@4602,4733.46 Rd.0 Rd.1@5890.63,2399.99 Rd.1@5890.63,2400 Rd.1@5969.37,2399.99 Rd.1@5969.37,2400 RJ45.G RJ45.H Rled.0 Rled.1@5009.99,3200.63 Rled.1@5009.99,3279.37 Rled.1@5010,3200.63 Rled.1@5010,3279.37 U2.8 U2.9 U2.10 U2.11 U2.12 U2.33 U11.2 U11.3 U11.4 U11.8 U11.20 U11.21 U11.22 U11.28 U11.35 U11.44 U11.45 U11.50 U11.55 U11.56 U11.57 U11.58 U11.59 U11.62

## Polygon pours and split planes (outlines as drawn)
GND on Bottom Layer "GND_L02_P002" (solid, remove dead copper, pour order 2): 4429.13,2165.35 6299.21,2165.35 6299.21,5216.54 4429.13,5216.54
GND on Top Layer "GND_L01_P000" (solid, remove dead copper, pour order 0): 4429.13,2165.35 6299.21,2165.35 6299.21,5216.54 4429.13,5216.54

## Keep-outs
Keep-Out Layer:
  the board outline again, w7.87

## Other copper
Top Layer:
  pour cut-out: 4846.92,5224 5467,5224 5467,4380 4846.92,4380
Bottom Layer:
  pour cut-out: 4846.92,5224 5467,5224 5467,4380 4846.92,4380

## Silkscreen, mask and mechanical layers (free items; w line width, h text height)
Top Overlay:
  lines w5: 5915.97,2633.23 5916.95,2632.24
  text "DP83848" at 5082,3775 h32 r90
  text "ARM" at 5840,2945 h98.43 r180
  text "Ethernet" at 4735,2934 h80
Drill Guide:
  lines w5.91: 4979,3678 5028,3678

## Text inside footprints (layer, text, board x,y; h text height)
C25: Top Overlay "+" at 4677.52,4334.8 h40 r90